# Altium PCB DRV8701EVM.PcbDoc (part 1 of 2)
Units mil, origin at the board's own origin, x right, y up, seen from the top; angles counter-clockwise.
Board outline 3500 x 2200 mil, 2 copper layers (Top Layer, Bottom Layer), stack 64.8 mil thick; 118 components, 65 nets, 313 pads, 397 vias.
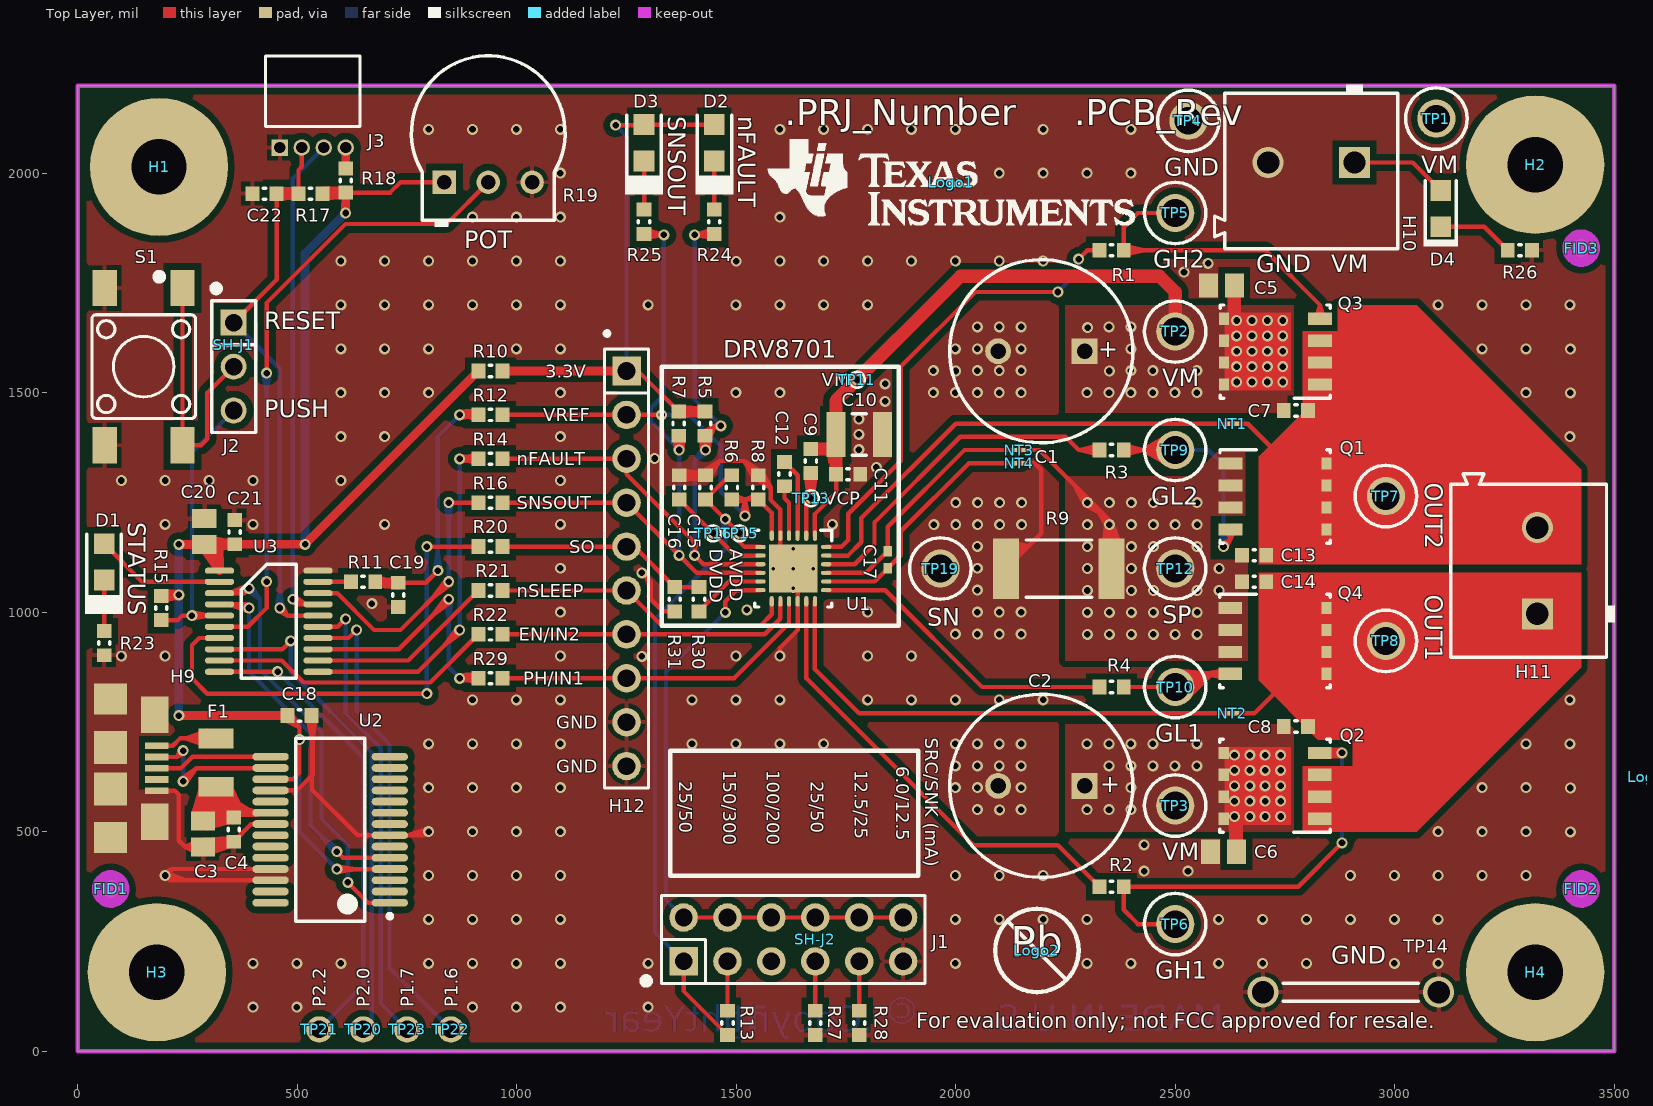
[diagram p0: Top Layer view]
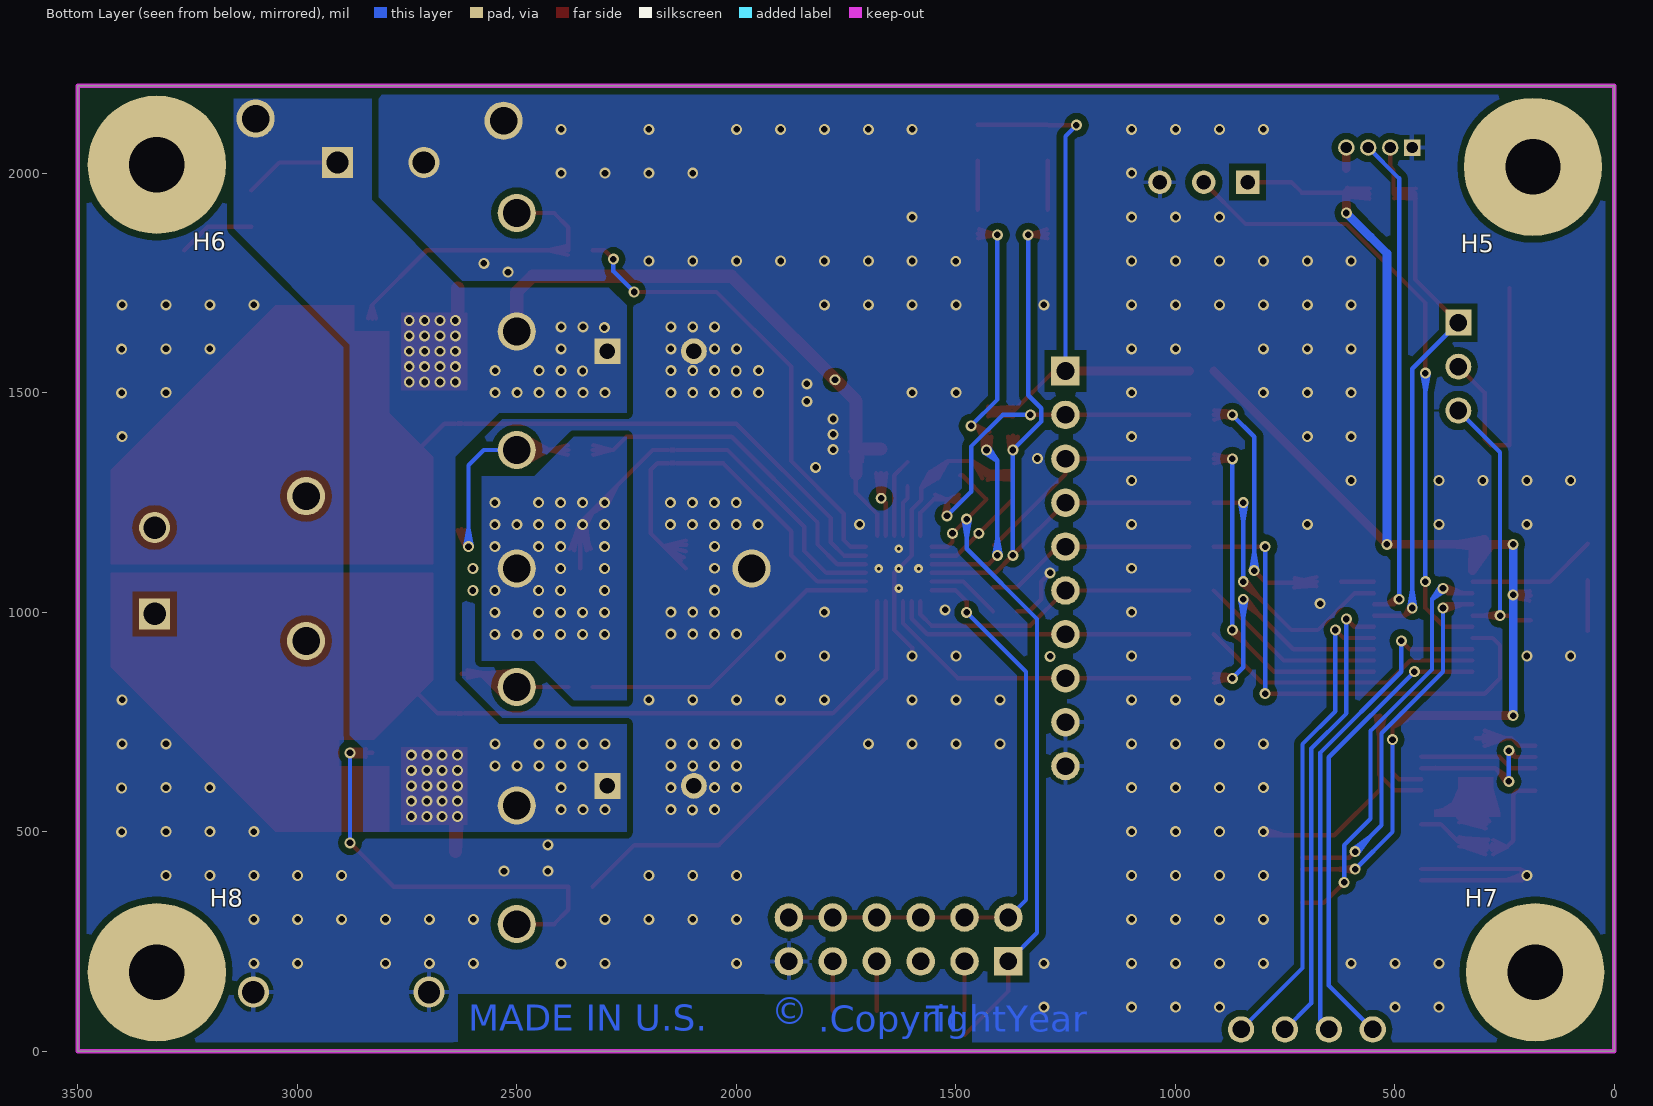
[diagram p1: Bottom Layer view, seen from below]

## Layer stack, top to bottom
Top Solder: solder mask 0.4, Solder Resist, Dk 3.5
Top Layer: signal copper 2.8
Dielectric1: core 59.2, FR-4, Dk 4.8
Bottom Layer: signal copper 2.8
Bottom Solder: solder mask 0.4, Solder Resist, Dk 3.5

## Board outline
0,0 3500,0 3500,2200 0,2200

## Design rules (kind name [scope] priority, off if disabled: settings)
AcuteAngle [All] p1: minimum=4.50000000000000E+0001 checktracksonly=FALSE
AssemblyTestPointUsage [All] p1: valid=2
Clearance Clearance_BoardEdge_MountingHoles [OnCopper and InComponentClass('Mounting Holes') vs IsKeepOut] p1: gap=15 ignorepadtopadclearanceinfootprint=FALSE except(0: Arc-Hole Track-Hole SMDPad-Hole THPad-Hole Via-Hole Fill-Hole Poly-Hole Region-Hole Text-Hole)
Clearance Clearance_BoardEdge_Poly [OnCopper and InPoly vs IsKeepOut] p2: gap=15 ignorepadtopadclearanceinfootprint=FALSE except(0: Arc-Hole Track-Hole SMDPad-Hole THPad-Hole Via-Hole Fill-Hole Poly-Hole Region-Hole Text-Hole)
Clearance Clearance_BoardEdge [OnCopper and Not InComponentClass('Logo') and not InComponentClass('FiducialMark') and not InRegion(1000,500,4000,800) and Not IsKeepout vs IsKeepOut] p3: gap=15 ignorepadtopadclearanceinfootprint=FALSE except(0: Arc-Hole Track-Hole SMDPad-Hole THPad-Hole Via-Hole Fill-Hole Poly-Hole Region-Hole Text-Hole)
Clearance Clearance_Poly [InPolygon] p4: gap=15 ignorepadtopadclearanceinfootprint=FALSE except(0: Arc-Hole Track-Hole SMDPad-Hole THPad-Hole Via-Hole Fill-Hole Poly-Hole Region-Hole Text-Hole)
Clearance [All] p5: gap=7 ignorepadtopadclearanceinfootprint=FALSE except(0: Arc-Hole Track-Hole SMDPad-Hole THPad-Hole Via-Hole Fill-Hole Poly-Hole Region-Hole Text-Hole)
ComponentClearance ComponentClearance_Shunt [InComponentClass('Header') vs InComponentClass('Shunt')] p1: gap=0 collisioncheckmode=3 verticalgap=0 showdistances=FALSE
ComponentClearance ComponentClearance_Logo [InComponentClass('Logo')] p2: gap=15 collisioncheckmode=3 verticalgap=10 showdistances=FALSE
ComponentClearance ComponentClearance_ScrewToNut [(HasFootprint('NY PMS 440 0025 PH')) vs (HasFootprint('Keystone_1902C'))] p3: gap=5 collisioncheckmode=3 verticalgap=10 showdistances=FALSE
ComponentClearance ComponentClearance_MountingHoles [InComponentClass('Mounting Holes')] p4: gap=15 collisioncheckmode=3 verticalgap=100000 showdistances=FALSE
ComponentClearance ComponentClearance_SmallPassives [HasFootprint('0201*') or HasFootprint('0402*') or HasFootprint('0508') or HasFootprint('0603*') or HasFootprint('0612') or HasFootprint('0805*') or HasFootprint('0815*') or HasFootprint('0830*') or HasFootprint('1206*') or HasFootprint('1210*') or HasFootprint('1808*') or HasFootprint('1812*') or HasFootprint('1825*') or HasFootprint('2010*') or HasFootprint('2220*') or HasFootprint('2225*') or HasFootprint('2512*') or HasFootprint('2728*') or HasFootprint('3518*') vs HasFootprint('0201*') or HasFootprint('0402*') or HasFootprint('0508') or HasFootprint('0603*') or HasFootprint('0612') or HasFootprint('0805*') or HasFootprint('0815*') or HasFootprint('0830*') or HasFootprint('1206*') or HasFootprint('1210*') or HasFootprint('1808*') or HasFootprint('1812*') or HasFootprint('1825*') or HasFootprint('2010*') or HasFootprint('2220*') or HasFootprint('2225*') or HasFootprint('2512*') or HasFootprint('2728*') or HasFootprint('3518*')] p5: gap=15 collisioncheckmode=3 verticalgap=10 showdistances=FALSE
ComponentClearance ComponentClearance_THtoSMT [IsThruComponent vs IsSMTComponent] p6: gap=15 collisioncheckmode=3 verticalgap=25 showdistances=FALSE
ComponentClearance ComponentClearance_THtoTH [IsThruComponent vs IsThruComponent] p7: gap=15 collisioncheckmode=3 verticalgap=15 showdistances=FALSE
ComponentClearance [All] p8: gap=15 collisioncheckmode=3 verticalgap=10 showdistances=FALSE
DiffPairsRouting [All] p1: maxlimit=100 minlimit=10 mostfreqgap=10 toplayer_minwidth=15 toplayer_maxwidth=15 toplayer_prefwidth=15 bottomlayer_minwidth=15 bottomlayer_maxwidth=15 bottomlayer_prefwidth=15 maxuncoupledlength=1000
FabricationTestPointUsage TestPointUsage [All] p1: valid=2 allowmultiple=FALSE
FabricationTestpoint Testpoint [All] p1: side=3 testpointundercomponent=TRUE minsize=40 maxsize=100 preferedsize=60 minholesize=0 maxholesize=40 preferedholesize=32 testpointgrid=1 allowsidetop=TRUE allowsidebottom=TRUE usegrid=TRUE gridtolerance=0.01
FanoutControl Fanout_LCC [IsLCC] p1: bgadir=Out bgaviamode=Centered fanoutstyle=Auto fanoutdirection=Alternating viagrid=1 // Fanout_LCC (Default Rule)
FanoutControl Fanout_BGA [IsBGA] p2: bgadir=Out bgaviamode=Centered fanoutstyle=Auto fanoutdirection=Alternating viagrid=1 // Fanout_BGA (Default Rule)
FanoutControl Fanout_Default [All] p4: bgadir=Out bgaviamode=Centered fanoutstyle=Auto fanoutdirection=Alternating viagrid=1 // Fanout_Default (Default Rule)
FanoutControl Fanout_Small [(CompPinCount < 5)] p5: bgadir=Out bgaviamode=Centered fanoutstyle=Auto fanoutdirection=OutThenIn viagrid=1 // Fanout_Small (Default Rule)
HoleSize [All] p1: absolutevalues=TRUE maxlimit=251 minlimit=8 maxpercent=80.000 minpercent=20.000
MinimumAnnularRing MinimumAnnularRing_ThermalPadVias [IsVia and InAnyComponent] p1: minimumring=3.9
MinimumAnnularRing [All] p2: minimumring=3.9
MinimumSolderMaskSliver MinimumSolderMaskSliver_Logo [InComponentClass('Logo') vs InComponentClass('Logo')] p1: minsoldermaskwidth=0.7
MinimumSolderMaskSliver [All] p2: minsoldermaskwidth=2
PlaneConnect [All] p1: planeconnectstyle=Relief reliefexpansion=10 reliefentries=4 reliefconductorwidth=10 reliefairgap=10
PolygonConnect PolygonConnect_1 [IsNamedPolygon('TOP_GND_PLN') or IsNamedPolygon('BOT_GND_PLN') vs Not (InComponent('U1') or InComponent('U2') or InComponent('U3') or InComponent('Q3') or InComponent('Q4') or InComponent('Q5') or InComponent('Q6') or InComponent('C1') or InComponent('C2') or InComponent('C5') or InComponent('C6') or InComponent('C10') or InComponent('C11') or InComponent('C15') or InComponent('C16') or InComponent('R8') or InComponent('R9') or InComponent('H9') or InComponent('H10') or InComponent('TP4') or IsStitchingVia or IsVia)] p1: connectstyle=Relief reliefconductorwidth=10 reliefentries=4 polygonreliefangle="90 Angle" airgapwidth=10
PolygonConnect [All] p2: connectstyle=Direct reliefconductorwidth=10 reliefentries=4 polygonreliefangle="90 Angle" airgapwidth=10
RoutingVias ThermalPadVias [IsVia and InAnyComponent] p1: holewidth=7.87 width=19.68 viastyle="Through Hole" minholewidth=7.87 minwidth=19.68 maxholewidth=12.99 maxwidth=23.62
RoutingVias [All] p2: holewidth=16 width=34 viastyle="Through Hole" minholewidth=7.87 minwidth=25 maxholewidth=40 maxwidth=65
SMDToCorner [All] p1: distance=30000
SilkToSilkClearance [All] p1: silktosilkclearance=5
SilkToSolderMaskClearance SilkscreenOverComponentPads [IsPad] p1: minsilkscreentomaskgap=1.95 clearancetoexposedcopper=TRUE
SolderMaskExpansion [All] p1: expansion=1.97 istentingtop=FALSE
Width [All] p1: maxlimit=100 minlimit=6 preferedwidth=10 checkconnectedcopper=TRUE
16 further rules are at their usual default settings.

## Classes and differential pairs
component class Header: H12 J1 J2
component class AssemblyNote: ZZ1 ZZ2 ZZ3 ZZ4
component class DRV8701EVM_HARDWARE: FID1 FID2 FID3 H1 H2 H3 H4 H5 H6 H7 H8 Logo1 Logo2 Logo3 ZZ1 ZZ2 ZZ3 ZZ4
component class Logo: Logo1
component class DRV8701EVM_SCHEMATIC: C1 C2 C3 C4 C5 C6 C7 C8 C9 C10 C11 C12 C13 C14 C15 C16 C17 C18 C19 C20 C21 C22 D1 D2 D3 D4 F1 H9 H10 H11 H12 J1 J2 J3 NT1 NT2 NT3 NT4 Q1 Q2 Q3 Q4 R1 R2 R3 R4 R5 R6 R7 R8 R9 R10 R11 R12 R13 R14 R15 R16 R17 R18 R19 R20 R21 R22 R23 R24 R25 R26 R27 R28 R29 R30 R31 S1 SH-J1 SH-J2 TP1 TP2 TP3 TP4 TP5 TP6 TP7 TP8 TP9 TP10 TP11 TP12 TP13 TP14 TP15 TP16 TP19 TP20 TP21 TP22 TP23 U1 U2 U3
component class Shunt: SH-J1 SH-J2
component class FiducialMark: FID1 FID2 FID3
component class "Mounting Holes": H1 H2 H3 H4

## Components (designator, comment, footprint, x,y, rotation, side; value= is the part's Value field where it differs from the comment)
C1 "ECA-1HM471" M_1000x2000 2195,1595 r180 top
C2 "ECA-1HM471" M_1000x2000 2195,605 r180 top
C3 "C2012X7R1A475M" 0805L 285,495 r270 top
C4 "C0603C104K8RACTU" 0603L 355,505 r270 top
C5 "GRM21BR71H105KA12L" 0805L 2605,1745 r180 top
C6 "GRM21BR71H105KA12L" 0805L 2610,455 r180 top
C7 "DNP" 0603L 2775,1460 r0 top
C8 "DNP" 0603L 2775,740 r0 top
C9 "C1608X7R1C105K" 0603L 1670,1345 r90 top
C10 "GRM32ER71H106KA12L" 1210L 1780,1405 r0 top
C11 "C1608X7R1H104K" 0603L 1755,1315 r0 top
C12 "C1608X7R1H104K" 0603L 1610,1315 r270 top
C13 "DNP" 0603L 2680,1130 r180 top
C14 "DNP" 0603L 2680,1070 r180 top
C15 "GRM188R70J105KA01D" 0603L 1430,1285 r90 top
C16 "GRM188R70J105KA01D" 0603L 1370,1285 r270 top
C17 "GRM155R71C102KA01D" 0402L 1845,1120 r270 top
C18 "C0603C104K8RACTU" 0603L 505,765 r0 top
C19 "GRM188R70J105KA01D" 0603L 730,1040 r270 top
C20 "C2012X7R1A475M" 0805L 288.2,1184.8 r90 top
C21 "C0603C104K8RACTU" 0603L 357.2,1182.8 r90 top
C22 "GRM188R71C102KA01D" 0603L 425.21,1954 r180 top
D1 "LTST-C171GKT" LED_LTST-C171 60,1115 r270 top
D2 "LTST-C170KRKT" LED_LTST-C170 1450,2070 r270 top
D3 "LTST-C170KRKT" LED_LTST-C170 1290,2070 r270 top
D4 "LTST-C171GKT" LED_LTST-C171 3105,1920 r270 top
F1 "1206L050/15YR" 1206_FUSE 315,658 r270 top
FID1 "Fiducial" Fiducial10-20 75,370 r0 top
FID2 "Fiducial" Fiducial10-20 3425,370 r0 top
FID3 "Fiducial" Fiducial10-20 3425,1830 r0 top
H1 "NY PMS 440 0025 PH" "NY PMS 440 0025 PH" 185,2015 r0 top locked
H2 "NY PMS 440 0025 PH" "NY PMS 440 0025 PH" 3320,2020 r0 top locked
H3 "NY PMS 440 0025 PH" "NY PMS 440 0025 PH" 180,180 r0 top locked
H4 "NY PMS 440 0025 PH" "NY PMS 440 0025 PH" 3320,180 r0 top locked
H5 "1902C" Keystone_1902C 185.13,2015.01 r180 bottom
H6 "1902C" Keystone_1902C 3320.36,2020 r180 bottom
H7 "1902C" Keystone_1902C 180.36,180 r180 bottom
H8 "1902C" Keystone_1902C 3320.36,180 r180 bottom
H9 "ZX62-B-5PA(11)" CONN_USB_micro_ZX62-B-5PA 180,645 r270 top
H10 "691 101 710 002" Wurth_691101710002 2810,2025 r180 top
H11 "691 101 710 002" Wurth_691101710002 3325,1095 r90 top
H12 "TSW-110-07-G-S" TSW-110-07-G-S 1250,1100 r270 top
J1 "PEC06DAAN" CONN_PEC06DAAN 1630,255 r0 top
J2 "PEC03SAAN" CONN_PEC03SAAN 355,1560 r270 top
J3 "851-43-004-20-001000" CONN_851-43-004-20-001000 535.21,2059 r180 top
Logo1 "Texas Instruments" TI_Stacked_Overlay_Small 1990,1980 r0 top
Logo2 "Pb-Free Symbol" Pb-Free_Overlay_Medium 2185,230 r0 top
Logo3 "FCC disclaimer" FCC_disclaimer 3583,626 r90 top
NT1 "Net-Tie" Net-Tie_10mil 2630,1430 r0 top
NT2 "Net-Tie" Net-Tie_10mil 2630,770 r0 top
NT3 "Net-Tie" Net-Tie_10mil 2145,1370 r180 top
NT4 "Net-Tie" Net-Tie_10mil 2145,1340 r0 top
Q1 "CSD18532Q5B" TRANS_NexFET_Q5B 2720.3,1594.09 r180 top
Q2 "CSD18532Q5B" TRANS_NexFET_Q5B 2720,605 r180 top
Q3 "CSD18532Q5B" TRANS_NexFET_Q5B 2735.3,1264.09 r0 top
Q4 "CSD18532Q5B" TRANS_NexFET_Q5B 2735,935 r0 top
R1 "CRCW06030000Z0EA" 0603L 2355,1825 r180 top
R2 "CRCW06030000Z0EA" 0603L 2355,375 r0 top
R3 "CRCW06030000Z0EA" 0603L 2355,1370 r180 top
R4 "CRCW06030000Z0EA" 0603L 2355,830 r0 top
R5 "CRCW060310K0JNEA" 0603L 1428.7,1430 r270 top
R6 "DNP" 0603L 1490,1285 r90 top
R7 "CRCW060310K0JNEA" 0603L 1368.7,1430 r270 top
R8 "DNP" 0603L 1550,1285 r270 top
R9 "CRA2512-FZ-R010ELF" 2512M 2235,1100 r0 top
R10 "CRCW06030000Z0EA" 0603L 940,1550 r180 top
R11 "CRCW060310K0JNEA" 0603L 650,1070 r0 top
R12 "CRCW06030000Z0EA" 0603L 940,1450 r180 top
R13 "CRCW060368K0JNEA" 0603L 1480,65 r270 top
R14 "CRCW06030000Z0EA" 0603L 940,1350 r180 top
R15 "CRCW060347K0JNEA" 0603L 190,1010 r90 top
R16 "CRCW06030000Z0EA" 0603L 940,1250 r180 top
R17 "CRCW060347K0JNEA" 0603L 530.21,1954 r0 top
R18 "CRCW06030000Z0EA" 0603L 610.21,1984 r270 top
R19 "3352T-1-503LF" Bourns_3352T 935,1980 r0 top
R20 "CRCW06030000Z0EA" 0603L 940,1150 r180 top
R21 "CRCW06030000Z0EA" 0603L 940,1050 r180 top
R22 "CRCW06030000Z0EA" 0603L 940,950 r180 top
R23 "CRCW0603330RJNEA" 0603L 60,930 r90 top
R24 "CRCW0603330RJNEA" 0603L 1450,1890 r90 top
R25 "CRCW0603330RJNEA" 0603L 1290,1890 r90 top
R26 "CRCW06034K99FKEA" 0603L 3285,1825 r180 top
R27 "CRCW0603200KJNEA" 0603L 1680,65 r90 top
R28 "CRCW060333K0JNEA" 0603L 1780,65 r90 top
R29 "CRCW06030000Z0EA" 0603L 940,850 r180 top
R30 "CRCW06037K50JNEA" 0603L 1415,1030 r270 top
R31 "CRCW060310K0JNEA" 0603L 1360,1030 r270 top
S1 "4-1437565-1" SW_FSM4JSMA 150,1560 r0 top
SH-J1 "969102-0000-DA" SNT-100-BK-G 355,1610 r90 top
SH-J2 "969102-0000-DA" SNT-100-BK-G 1680,255 r90 top
TP1 "5005" Keystone5005 3095,2125 r0 top
TP2 "5005" Keystone5005 2500,1640 r0 top
TP3 "5005" Keystone5005 2500,560 r0 top
TP4 "5006" Keystone5006 2530,2120 r0 top
TP5 "5007" Keystone5007 2500,1910 r0 top
TP6 "5007" Keystone5007 2500,290 r0 top
TP7 "5007" Keystone5007 2980,1265 r0 top
TP8 "5007" Keystone5007 2980,935 r0 top
TP9 "5007" Keystone5007 2500,1370 r0 top
TP10 "5007" Keystone5007 2500,830 r0 top
TP11 "VM" TP_VIA_018RND008 1775,1530 r90 top
TP12 "5006" Keystone5006 2500,1100 r0 top
TP13 "VCP" TP_VIA_018RND008 1670,1260 r180 top
TP14 "D3082-05" Harwin_D3082-05 2900,135 r180 top
TP15 "AVDD" TP_VIA_018RND008 1507.44,1180 r0 top
TP16 "DVDD" TP_VIA_018RND008 1447.44,1180 r90 top
TP19 "5006" Keystone5006 1965,1100 r0 top
TP20 "TESTPOINT" TP_VIA_060RND040 650,50 r90 top
TP21 "TESTPOINT" TP_VIA_060RND040 550,50 r90 top
TP22 "TESTPOINT" TP_VIA_060RND040 850,50 r90 top
TP23 "TESTPOINT" TP_VIA_060RND040 750,50 r90 top
U1 "DRV8701ERGER" RGE0024F 1630,1100 r270 top
U2 "FT232RL" SSOP28_N 575,505 r180 top
U3 "MSP430G2553IPW20" PW0020A_N 435,980 r0 top
ZZ1 "This Assembly Note is for PCB labels only" AssemblyNoteLabel 185,2655 r0 top
ZZ2 "These assemblies are ESD sensitive, ESD precautions shall be observed." AssemblyNote 185,2569.11 r0 top
ZZ3 "These assemblies must be clean and free from flux and all contaminants. Use of no clean flux is not acceptable." AssemblyNote 185,2480.56 r0 top
ZZ4 "These assemblies must comply with workmanship standards IPC-A-610 Class 2, unless otherwise specified." AssemblyNote 185,2395 r0 top

## Footprints (in the part's own frame and the unit in brackets; to place one, negate y for a bottom-side part, rotate by r counter-clockwise, add the part's x,y. Pads: shape width x height; smd on the part's side, far side on the other; paste and mask are expansions set on the pad)
0402L [mm] "0402 from SM-752 data"
  rect 0.6x0.5 smd: 1(-0.5,0) 2(0.5,0)
  body extent -0.55,-0.3 0.55,0.3, height 0.6
0603L [mm] "0603 from SM-752 data"
  rect 0.8x0.85 smd: 1(-0.7,0) 2(0.7,0)
  silkscreen extent -0.07,-0.33 0.07,0.33, body extent -0.87,-0.47 0.87,0.47, height 0.85
0805L [mm] "0805 from SM-752 data"
  rect 1.1x1.4 smd: 1(-0.75,0) 2(0.75,0)
  body extent -1.1,-0.72 1.1,0.72, height 1.1
1206_FUSE [mil]
  rect 45x80 smd mask+2: 1(-55,0) 2(55,0)
1210L [mm] "1210 from SM-752 data"
  rect 1.1x2.6 smd: 1(-1.35,0) 2(1.35,0)
  silkscreen extent -0.4,-1.2 0.4,1.2, body extent -1.7,-1.35 1.7,1.35, height 1.35
2512M [mm] "Chip Resistor, Body 6.3x3.2mm, IPC Low Density"
  rect 1.5x3.5 smd: 1(-3.05,0) 2(3.05,0)
  silkscreen extent -1.9,-1.65 1.9,1.65, body extent -3.22,-1.67 3.22,1.67, height 0.71
AssemblyNote [mil] "Assembly Note"
AssemblyNoteLabel [mil] "Assembly Note for PCB Labels"
Bourns_3352T [mm] "TH, 3-Leads, Body 9.53x8.89mm, Pitch 2.54mm"
  rect 1.35x1.35 hole 0.85: 1(-2.54,0)
  round 1.35 hole 0.85: 2(0,0) 3(2.54,0)
  silkscreen extent -4.44,-2.6 4.44,7.31, body extent -4.44,-2.21 4.45,7.32, height 3.81
CONN_851-43-004-20-001000 [mm] "MILL-MAX"
  rect 0.95x0.95 hole 0.65: 1(1.905,0)
  round 0.95 hole 0.65: 2(0.635,0) 3(-0.635,0) 4(-1.905,0)
  silkscreen extent -2.73,-5.31 2.73,-1.22, body extent -2.73,-5.31 2.73,0.23, height 2.23
CONN_PEC03SAAN [mm] "SULLINS"
  rect 1.5x1.5 hole 1.016: 1(-2.54,0)
  round 1.5 hole 1.016: 2(0,0) 3(2.54,0)
  silkscreen extent -4.72,-1.27 3.81,1.27, body extent -3.84,-1.3 3.84,1.3, height 8.38
CONN_PEC06DAAN [mm] "SULLINS"
  rect 1.65x1.65 hole 1.016 mask+0: 1(-6.35,-1.27)
  round 1.65 hole 1.016 mask+0: 2(-6.35,1.27) 3(-3.81,-1.27) 4(-3.81,1.27) 5(-1.27,-1.27) 6(-1.27,1.27) 7(1.27,-1.27) 8(1.27,1.27) 9(3.81,-1.27) 10(3.81,1.27) 11(6.35,-1.27) 12(6.35,1.27)
  silkscreen extent -8.72,-2.6 7.62,2.54, body extent -7.62,-2.54 7.62,2.54, height 8.38
CONN_USB_micro_ZX62-B-5PA [mm] "Hirose"
  rect 0.4x1.35 smd: 1(-1.3,0) 2(-0.65,0) 3(0,0) 4(0.65,0) 5(1.3,0)
  rect 1.9x1.9 smd: 6(-1.2,-2.675) 7(1.2,-2.675)
  rect 1.8x1.9 smd: 8(-4,-2.675) 9(4,-2.675)
  rect 2.1x1.6 smd: 10(-3.1,-0.125) 11(3.1,-0.125)
  body extent -3.75,-5.32 3.75,0.18, height 2.55
FCC_disclaimer [mil]
Fiducial10-20 [mm]
  round 1 smd paste-0.5 mask+0.5: 1(0,0)
  Top Layer keep-out circle w1.178: c0,0 r0.5
Harwin_D3082-05 [mm] "Shorting Plug, 10.16mm spacing, TH"
  round 1.8 hole 1.3: 1(-5.08,0) 2(5.08,0)
  silkscreen extent -3.9,-0.53 3.9,0.53, body extent -5.6,-0.52 5.61,0.52, height 6.63
Keystone5005 [mil] "Keystone Compact loops"
  round 87 hole 63: 1(0,0)
  silkscreen extent -70,-70 70,70, body extent -63,-63 62,63, height 225
Keystone5006 [mil] "Keystone Compact loops"
  round 87 hole 63: 1(0,0)
  silkscreen extent -70,-70 70,70, body extent -63,-63 62,63, height 225
Keystone5007 [mil] "Keystone Compact loops"
  round 87 hole 63: 1(0,0)
  silkscreen extent -70,-70 70,70, body extent -63,-63 62,63, height 225
Keystone_1902C [mil] "Hex Standoff, 4-40 threaded, nylon"
  round 1 on Mech4: 0(0,0)
  body extent -145,-126 146,126, height 501
LED_LTST-C170 [mm] "LITE-ON"
  rect 1.2x1.2 smd: 1(-1.05,0) 2(1.05,0)
  silkscreen extent -1.6,-1.1 3,1.1, body extent -1.05,-0.67 1.05,0.67, height 1.1
LED_LTST-C171 [mm] "LITE-ON"
  rect 1.2x1.2 smd: 1(-1.05,0) 2(1.05,0)
  silkscreen extent -1.6,-1.1 3,1.1, body extent -1.05,-0.67 1.05,0.67, height 0.8
M_1000x2000 [mm] "Panasonic"
  rect 1.5x1.5 hole 0.9: 1(-2.5,0)
  round 1.5 hole 0.9: 2(2.5,0)
  silkscreen extent -5.3,-5.3 5.3,5.3, body extent -5.21,-5.24 5.24,5.24, height 22.01
Net-Tie_10mil [mil] "10mil net tie, no solder mask opening, no solder paste"
  rect 10x10 smd paste-5 mask-5: 1(-10,0) 2(10,0)
  Top Layer region: -6,5 6,5 6,-5 -6,-5
"NY PMS 440 0025 PH" [mm] "4-40 nylon screw and mounting hole"
  round 8 hole 3.2: 1(0,0)
  body extent -3.3,-3.3 3.3,3.3, height 2.69
Pb-Free_Overlay_Medium [mil]
  silkscreen extent -95,-95 95,95
PW0020A_N [mm] "TSOP, 20-Leads, Body 6.5x4.4mm, Pitch 0.65mm, IPC Medium Density"
  oval 1.7x0.35 smd: 1(-2.85,2.925) 2(-2.85,2.275) 3(-2.85,1.625) 4(-2.85,0.975) 5(-2.85,0.325) 6(-2.85,-0.325) 7(-2.85,-0.975) 8(-2.85,-1.625) 9(-2.85,-2.275) 10(-2.85,-2.925) 11(2.85,-2.925) 12(2.85,-2.275) 13(2.85,-1.625) 14(2.85,-0.975) 15(2.85,-0.325) 16(2.85,0.325) 17(2.85,0.975) 18(2.85,1.625) 19(2.85,2.275) 20(2.85,2.925)
  silkscreen extent -1.6,-3.3 1.6,3.3, body extent -3.21,-3.25 3.21,3.25, height 0.99
RGE0024F [mm] "QFN, 24-Leads, Body 4x4mm, Pitch 0.5mm, Thermal Pad 2.8x2.8mm, TI Recommended"
  oval 0.6x0.24 smd: 1(-1.9,1.25) 2(-1.9,0.75) 3(-1.9,0.25) 4(-1.9,-0.25) 5(-1.9,-0.75) 6(-1.9,-1.25) 13(1.9,-1.25) 14(1.9,-0.75) 15(1.9,-0.25) 16(1.9,0.25) 17(1.9,0.75) 18(1.9,1.25)
  oval 0.24x0.6 smd: 7(-1.25,-1.9) 8(-0.75,-1.9) 9(-0.25,-1.9) 10(0.25,-1.9) 11(0.75,-1.9) 12(1.25,-1.9) 19(1.25,1.9) 20(0.75,1.9) 21(0.25,1.9) 22(-0.25,1.9) 23(-0.75,1.9) 24(-1.25,1.9)
  rect 2.8x2.8 smd paste-1.4: 25(0,0)
  silkscreen extent -2.22,-2.22 2.22,2.22, body extent -2.07,-2.07 2.08,2.08, height 1.01
SNT-100-BK-G [mil] "Samtec STEP model"
  round 1 on Mech3: 0(0,0)
  body extent -100,-50 100,50, height 344
SSOP28_N [mm] "SOP, 28-Leads, Body 10.2x5.3mm, Pitch 0.65mm, IPC Medium Density"
  oval 2.1x0.45 smd mask+0.07: 1(-3.45,4.225) 2(-3.45,3.575) 3(-3.45,2.925) 4(-3.45,2.275) 5(-3.45,1.625) 6(-3.45,0.975) 7(-3.45,0.325) 8(-3.45,-0.325) 9(-3.45,-0.975) 10(-3.45,-1.625) 11(-3.45,-2.275) 12(-3.45,-2.925) 13(-3.45,-3.575) 14(-3.45,-4.225) 15(3.45,-4.225) 16(3.45,-3.575) 17(3.45,-2.925) 18(3.45,-2.275) 19(3.45,-1.625) 20(3.45,-0.975) 21(3.45,-0.325) 22(3.45,0.325) 23(3.45,0.975) 24(3.45,1.625) 25(3.45,2.275) 26(3.45,2.925) 27(3.45,3.575) 28(3.45,4.225)
  silkscreen extent -3.57,-5.3 2,5.3, body extent -2.7,-5.3 2.7,5.3, height 2
SW_FSM4JSMA [mm] "Alcoswitch"
  rect 1.4x2.1 smd: 1(2.25,4.55) 2(2.25,-4.55) 3(-2.25,4.55) 4(-2.25,-4.55)
  silkscreen extent -3,-3 3,5.4, body extent -3,-5 3,5, height 5.1
TI_Stacked_Overlay_Small [mil]
  silkscreen extent -418,-98 418,98
TP_VIA_018RND008 [mil] "TP_VIA_018RND008"
  round 25 hole 15: 1(0,0)
  silkscreen extent -18,-18 18,18
TP_VIA_060RND040 [mil] "TP_VIA_060RND040"
  round 60 hole 40: 1(0,0)
TRANS_NexFET_Q5B [mm] "TI recommended land pattern (nominal) November 2012"
  rect 1.372x0.71 smd paste-0.4: 1(-2.776,1.905) 2(-2.776,0.635) 3(-2.776,-0.635) 4(-2.776,-1.905)
  rect 0.59x0.71 smd paste-0.3: 5(2.776,-1.905) 6(2.776,-0.635) 7(2.776,0.635) 8(2.776,1.905)
  Top Layer region: -1.106,-2.26 2.744,-2.26 2.744,2.26 -1.106,2.26
  silkscreen extent -3.38,-2.7 3,2.7, body extent -3.23,-2.55 2.87,2.55, height 1.06
TSW-110-07-G-S [mm] "Samtec 100mil, 1x10, 230 mil above insulator"
  rect 1.65x1.65 hole 1.016 mask+0: 1(-11.43,0)
  round 1.65 hole 1.016 mask+0: 2(-8.89,0) 3(-6.35,0) 4(-3.81,0) 5(-1.27,0) 6(1.27,0) 7(3.81,0) 8(6.35,0) 9(8.89,0) 10(11.43,0)
  silkscreen extent -13.72,-1.27 12.7,1.27, body extent -12.7,-1.27 12.7,1.27, height 8.38
Wurth_691101710002 [mm] "Terminal Block, 5 mm, 2x1, TH"
  rect 1.8x1.8 hole 1.3: 1(-2.5,0)
  round 1.8 hole 1.3: 2(2.5,0)
  silkscreen extent -5,-4.5 5.6,5, body extent -5.6,-4 5.6,5, height 12.5

## Part data
C1 C2: "CAP, AL, 470 礔, 50 V, +/- 20%,  ohm, TH"
C3 C20: "CAP, CERM, 4.7uF, 10V, +/-20%, X7R, 0805"
C4 C18 C21: "CAP, CERM, 0.1uF, 10V, +/-10%, X7R, 0603"
C5 C6: "CAP, CERM, 1uF, 50V, +/-10%, X7R, 0805"
C7 C8 C13 C14: library part C1608X7R1H103K, "CAP, CERM, 0.01uF, 50V, +/-10%, X7R, 0603"
C9: "CAP, CERM, 1uF, 16V, +/-10%, X7R, 0603"
C10: "CAP, CERM, 10uF, 50V, +/-10%, X7R, 1210"
C11 C12: "CAP, CERM, 0.1uF, 50V, +/-10%, X7R, 0603"
C15 C16 C19: "CAP, CERM, 1uF, 6.3V, +/-10%, X7R, 0603"
C17: "CAP, CERM, 1000pF, 16V, +/-10%, X7R, 0402"
C22: "CAP, CERM, 1000pF, 16V, +/-10%, X7R, 0603"
D1 D4: "LED, Green, SMD"
D2 D3: "LED, Red, SMD"
F1: library part FUSE_1206L_SERIES, "Fuse, Poly Resetable PTC, 0.5A"
FID1 FID2 FID3: "Fiducial mark.  There is nothing to buy or mount."
H1 H2 H3 H4: "Machine Screw, Round, #4-40 x 1/4, Nylon, Philips panhead"
H5 H6 H7 H8: "Standoff, Hex, 0.5\"L #4-40 Nylon"
H9: "Connector, micro USB Type B, Receptacle, R/A, SMD"
H10 H11: "Terminal Block, 5 mm, 2x1, Tin, TH"
H12: "Header, 100mil, 10x1, Gold, TH"
J1: "Header, 100mil, 6x2, Tin, TH"
J2: "Header, 100mil, 3x1, Tin, TH"
J3: "SOCKET .050\" GRID SIP 4 POS R/A, TH"
Logo1: library part TI_Logo, "Texas Instrument Corporate Signature"
Logo2: library part Pb-Free
Logo3: library part FCC_disclaimer, "FCC_disclaimer"
NT1 NT2 NT3 NT4: "Single point connection between nets."
Q1 Q2 Q3 Q4: "MOSFET, N-CH, 60V, 172A, SON 5x6mm"
R1 R2 R3 R4 R10 R12 R14 R16 R18 R20 R21 R22 R29: "RES, 0 ohm, 5%, 0.1W, 0603"
R5 R7 R11: "RES, 10k ohm, 5%, 0.1W, 0603"
R6 R8: library part CRCW06030000Z0EA, "RES, 0 ohm, 5%, 0.1W, 0603"
R9: "RES, 0.01 ohm, 1%, 3W, 2512"
R13: "RES, 68k ohm, 5%, 0.1W, 0603"
R15 R17: "RES, 47k ohm, 5%, 0.1W, 0603"
R19: "Trimming Potentiometer, 50K, 0.5W, TH"
R23 R24 R25: "RES, 330 ohm, 5%, 0.1W, 0603"
R26: "RES, 4.99k ohm, 1%, 0.1W, 0603"
R27: "RES, 200k ohm, 5%, 0.1W, 0603"
R28: "RES, 33k ohm, 5%, 0.1W, 0603"
R30: "RES, 7.5 k, 5%, 0.1 W, 0603"
R31: "RES, 10 k, 5%, 0.1 W, 0603"
S1: "Switch, Tactile, SPST-NO, 0.05A, 12V, SMT"
SH-J1 SH-J2: "Shunt, 100mil, Gold plated, Black"
TP1 TP2 TP3: "Test Point, Compact, Red, TH"
TP4 TP12 TP19: "Test Point, Compact, Black, TH"
TP5 TP6 TP7 TP8 TP9 TP10: "Test Point, Compact, White, TH"
TP11 TP13 TP15 TP16: library part TESTPOINT, "TEST POINT.  No entry in BOM."
TP14: "1mm Uninsulated Shorting Plug, 10.16mm spacing, TH"
TP20 TP21 TP22 TP23: "TEST POINT.  No entry in BOM."
U1: "H-Bridge Gate Driver, RGE0024F"
U2: "USB to Serial UART, SSOP28"
U3: "16 MHz Mixed Signal Microcontroller with 16 KB Flash, 512 B SRAM and 24 GPIOs, -40 to 85 degC, 20-pin SOP (PW), Green (RoHS & no Sb/Br)"
ZZ1: library part AssemblyNoteLabel
ZZ2 ZZ3 ZZ4: library part AssemblyNote

## Via types
v1: diameter 25, hole 15, Top Layer to Bottom Layer, tented both sides, 392 vias
v2: diameter 20, hole 8, Top Layer to Bottom Layer, 5 vias

## Nets (pads, with @x,y where several pads share a name; then routed paths per layer and width w, separated by ;. In a path a pad name is that pad's centre, name@x,y a point inside that pad or via, vN(x,y) a via of type N, cw(c..) or ccw(c..) an arc to the next point about the centre after c; other vN are vias at no path point)
3.3V: D2.1 D3.1 H12.1 R5.1 R7.1 R10.1 | length 1987.1
  Top Layer w10: v1(1225,2110) 1288.66,2110 D3.1@1290,2111.34 D2.1@1450,2111.34 ; H12.1@1250,1550 1276.26,1550 R7.1@1368.7,1457.56 R5.1@1428.7,1457.56 ; R7.1@1369.05,1446.83 R5.1@1415.66,1449.48 ; R7.1@1369.05,1468.29 R5.1@1415.66,1465.64 ; R7.1@1372.75,1447.26 R5.1@1415.66,1465.64 ; R7.1@1372.75,1467.86 R5.1@1415.66,1449.48 ; R5.1@1426.45,1446.89 R7.1@1381.97,1457.56 ; R5.1@1426.45,1468.23 R7.1@1381.97,1457.56 ; R5.1@1427.72,1457.56 R7.1@1381.97,1457.56 ; R7.1@1369.69,1457.56 R5.1@1415.43,1457.56 ; R7.1@1369.69,1457.56 R5.1@1415.66,1449.48 ; R7.1@1369.69,1457.56 R5.1@1415.66,1465.64 ; R7.1@1369.69,1457.56 R5.1@1415.43,1457.56 ; R5.1@1415.43,1457.56 1370.95,1468.23 R5.1@1415.43,1457.56 ; R5.1@1415.43,1457.56 1370.95,1446.89 R5.1@1415.43,1457.56
  Top Layer w20: R10.1@967.56,1550 H12.1@1250,1550
  Bottom Layer w10: v1(1225,2110) 1250,2085 H12.1@1250,1550
3.3V_MCU: C18.1 C20.1 C21.1 R10.2 R15.2 R17.2 R18.2 R19.1 U2.4 U2.17 U3.1 | length 7062.6
  Top Layer w10: R15.2@190,1037.56 R15.2@192.44,1040 ; v1@226.84,1046.8 R15.2@193.12,1027.03 ; v1@227.72,1032.86 R15.2@191.79,1048.28 ; v1@228.82,1047.41 R15.2@190.98,1037.56 ; v1@229.25,1032.54 R15.2@192.44,1040 ; v1@229.25,1047.46 R15.2@192.44,1040 ; v1@229.75,1032.5 R15.2@190.98,1037.56 ; v1@230.88,1047.45 R15.2@191.79,1048.28 ; v1@231.8,1032.72 R15.2@193.12,1027.03 ; C20.1@287.93,1155 C20.1@288.2,1155.27 ; U2.17@439.17,620.16 490.16,620.16 ; C18.1@471.14,755.31 505,737.44 ; U2.17@471.65,620.16 490.16,620.16 ; C18.1@477.44,764.02 505,737.44 ; C18.1@477.44,765 505,737.44 ; C18.1@485.91,770.63 505,737.44 ; R17.2@556.48,1965.66 R18.2@602.54,1965.82 ; R17.2@557.57,1942.27 R18.2@603.56,1946.83 ; R17.2@557.77,1953.02 R18.2@603.56,1946.83 ; R17.2@557.77,1954 560.21,1956.45 R18.2@610.21,1956.45 711.45,1956.45 735,1980 R19.1@835,1980 ; R17.2@560.44,1963.43 R18.2@603.56,1946.83 ; R17.2@561.5,1944.91 R18.2@602.54,1965.82 ; v1(590,415) 710.39,415 U2.4@710.83,415.43 ; v1@590.66,407.53 632.5,415 v1@590.66,422.47 ; R18.2@607.96,1945.77 R17.2@563.48,1956.45 ; R18.2@607.96,1967.12 R17.2@563.48,1956.45 ; R18.2@609.22,1956.45 R17.2@563.48,1956.45 ; v1(610,1910) v1@610.21,1910.21 ; 639.49,415 U2.4@678.35,415.43 ; R15.2@190.98,1037.56 v1(230,1040) ; R15.2@190.98,1037.56 v1(230,1040) ; R15.2@191.79,1048.28 v1(230,1040) ; R15.2@191.79,1048.28 v1(230,1040) ; R15.2@192.44,1040 v1(230,1040) ; R15.2@192.44,1040 v1(230,1040) ; R15.2@193.12,1027.03 v1(230,1040) ; R15.2@193.12,1027.03 v1(230,1040) ; 490.16,620.16 505,635 v1(505,710) 505,737.44 ; R17.2@557.77,1954.99 R18.2@603.62,1956.45 ; R17.2@557.77,1954.99 R18.2@602.54,1965.82 ; R17.2@557.77,1954.99 R18.2@603.66,1956.45 ; R18.2@603.62,1956.45 558.69,1965.7 R18.2@603.66,1956.45 ; R18.2@603.62,1956.45 559.36,1944.36 R18.2@603.66,1956.45
  Top Layer w20: v1(230,765) C18.1@477.44,765 401.69,765 ; v1(230,1155) C21.1@357.17,1155 ; C20.1@280.47,1155 C21.1@356.22,1155.24 ; C20.1@284.07,1149.35 U3.1@322.8,1095.16 ; C20.1@284.29,1148.99 U3.1@322.17,1100.6 ; C20.1@295.14,1143.66 C21.1@357.17,1155 ; C20.1@295.19,1166.88 C21.1@357.17,1155.27 ; C20.1@295.24,1166.87 C21.1@357.17,1155 ; C20.1@304.94,1159.59 U3.1@322.17,1100.6 ; C20.1@305.03,1159.35 U3.1@322.8,1095.16 ; C21.1@357.2,1155.24 v1(517.68,1155.24) ; C21.1@358.19,1155.24 433.94,1155.24 ; 445.18,1155.24 v1(517.68,1155.24) ; R10.2@912.44,1550 v1(517.68,1155.24) ; C20.1@294.11,1155.27 322.17,1155.27 ; C20.1@294.11,1155.27 U3.1@322.17,1100.6 ; C20.1@294.11,1155.27 U3.1@322.8,1095.16 ; C20.1@294.11,1155.27 322.17,1155.27 ; C20.1@294.11,1155.27 C21.1@357.17,1155 ; C20.1@294.11,1155.27 C21.1@357.17,1155.27 ; C20.1@294.11,1155.27 C21.1@356.22,1155.24 ; C20.1@294.11,1155.27 C21.1@356.22,1155.24 ; C20.1@295.19,1143.67 C21.1@357.17,1155.27 ; C20.1@295.2,1143.67 C21.1@356.22,1155.24 ; C20.1@295.2,1143.67 C21.1@356.22,1155.24 ; U3.1@322.17,1100.6 322.17,1155.27 ; 322.17,1155.27 U3.1@322.8,1095.16 ; 322.17,1155.27 296.53,1166.67 322.17,1155.27 ; 322.17,1155.27 296.53,1143.87 322.17,1155.27 ; C21.1@356.22,1155.24 C20.1@288.2,1155.27 C21.1@357.17,1155.27 ; C21.1@356.22,1155.24 295.21,1166.87 C21.1@356.22,1155.24 ; R18.2@610.21,1956.45 610.21,1910.21 R18.2@610.21,1956.45 ; R18.2@610.21,1956.45 v1(610,1910) R18.2@610.21,1956.45
  Bottom Layer w10: v1@225,1155 v1@225.21,1155.21 ; v1(505,710) 505,500 v1(590,415)
  Bottom Layer w20: v1(230,765) v1(230,1155) 230,1082.5 ; 230,967.5 v1(230,1040) ; v1(517.68,1155.24) 517.68,1817.68 v1(610,1910) 555.07,1855.07
5V_USB: C3.1 C4.1 F1.2 U2.20 | length 1294.7
  Top Layer w10: C3.1@285,524.53 293.03,532.56 C4.1@355,532.56 ; C3.1@288.43,541 C4.1@341.63,540.56 ; C3.1@289.3,530.98 C4.1@341.63,540.56 ; C3.1@290.31,531.15 C4.1@343.16,532.56 ; C3.1@290.33,531.16 C4.1@344.72,532.56 ; C3.1@291.14,517.88 C4.1@347.23,523.21 ; C3.1@291.45,531.16 C4.1@347.23,523.21 ; C3.1@292.29,518.02 C4.1@344.72,532.56 ; C3.1@292.33,518.03 C4.1@343.16,532.56 ; C3.1@292.98,508 C4.1@347.23,523.21 ; C3.1@293.3,518.32 C4.1@341.63,540.56 ; C3.1@293.75,540.94 C4.1@347.23,523.21 ; C3.1@295.86,508.63 C4.1@344.72,532.56 ; C3.1@296,508.67 C4.1@343.16,532.56 ; C3.1@298.35,509.63 C4.1@341.63,540.56 ; C4.1@352.75,521.89 C3.1@308.27,532.56 ; C4.1@352.75,543.23 C3.1@308.27,532.56 ; C4.1@354.02,532.56 C3.1@308.27,532.56 ; C3.1@290.91,524.53 C4.1@343.16,532.56 ; C3.1@290.91,524.53 C4.1@347.23,523.21 ; C3.1@290.91,524.53 C4.1@344.72,532.56 ; C3.1@290.91,524.53 C4.1@341.63,540.56 ; C4.1@343.16,532.56 291,541.18 C4.1@344.72,532.56
AVDD: C15.1 J1.1 R6.2 R13.2 TP15.1 U1.7 | length 1701.3
  Top Layer w10: J1.1@1380,205 1380,137.44 R13.2@1480,37.44 ; R6.2@1490,1312.56 1485.12,1312.56 C15.1@1430,1257.44 TP15.1@1507.44,1180 1507.44,1160.71 1518.94,1149.21 U1.7@1555.2,1149.21
  Bottom Layer w10: J1.1@1380,205 1315,270 1315,985 1475,1145 v1(1475,1212.44) 1475,1169.94 ; v1@1467.53,1211.78 1475,1169.94 ; v1@1482.47,1211.78 1475,1169.94
DM: H9.2 U2.16 | length 559.3
  Top Layer w10: H9.2@180,670.59 225.59,670.59 ; H9.2@198.7,670.59 225.59,670.59 ; v1@233.81,689.24 225.59,670.59 ; v1@235.19,620.75 270,645 ; v1(240,615) 270,645 ; v1@244.24,678.81 225.59,670.59 ; v1@245.75,610.19 270,645 ; 367.83,645 U2.16@406.69,645.75 ; U2.16@439.17,645 270,645 ; 225.59,670.59 v1(240,685) 225.59,670.59
  Bottom Layer w10: v1(240,615) v1(240,685)
DP: H9.3 U2.15 | length 345.2
  Top Layer w10: H9.3@180,645 235,645 ; H9.3@198.7,645 235,645 ; 367.83,671.34 U2.15@406.69,671.34 ; U2.15@439.17,671.34 261.34,671.34 235,645
DVDD: C16.2 TP16.1 U1.8 | length 238.2
  Top Layer w10: C16.2@1370,1257.44 1497.91,1129.53 U1.8@1555.2,1129.53
EN/IN2: H12.7 R22.1 U1.14 | length 687.3
  Top Layer w10: R22.1@967.56,950 H12.7@1250,950 1565,950 1600.47,985.47 U1.14@1600.47,1025.2
EN/IN2_MCU: R22.2 U3.9 | length 692.8
  Top Layer w10: U3.9@322.8,890.43 464.57,890.43 514.76,840.24 802.68,840.24 R22.2@912.44,950 ; U3.9@349.37,890.43 386.26,890.43
GH1: R2.1 U1.17 | length 1039.6
  Top Layer w10: U1.17@1659.53,1025.2 1659.53,850.47 2040,470 2232.44,470 R2.1@2327.44,375
GH2: R1.2 U1.24 | length 1079.7
  Top Layer w10: U1.24@1704.8,1149.21 1739.21,1149.21 1755,1165 1755,1225 1875,1345 1875,1560 2045,1730 v1(2232.44,1730) ; v1(2280,1805) 2300,1825 R1.2@2327.44,1825
  Bottom Layer w10: v1(2232.44,1730) 2280,1777.56 v1(2280,1805)
GL1: R4.1 U1.19 | length 714.1
  Top Layer w10: U1.19@1704.8,1050.79 1839.21,1050.79 2060,830 R4.1@2327.44,830
GL2: R3.2 U1.22 | length 921.7
  Top Layer w10: U1.22@1704.8,1110 1770,1110 1815,1155 1815,1205 2010,1400 2250,1400 2280,1370 R3.2@2327.44,1370 2281.69,1370 ; R3.2@2326.18,1359.33 2281.69,1370 ; R3.2@2326.18,1380.67 2281.69,1370
GND: C1.2 C2.2 C3.2 C4.2 C5.2 C6.2 C10.2 C11.2 C15.2 C16.1 C18.2 C19.2 C20.2 C21.2 C22.2 H9.5 H9.6 H9.7 H9.8 H9.9 H9.10 H9.11 H10.2 H12.9 H12.10 J1.11 J3.1 NT4.2 R8.1 R9.1 R19.3 R23.1 R26.1 R27.1 R28.1 R31.2 S1.3 S1.4 TP4.1 TP14.1 TP14.2 TP19.1 U1.5 U1.16 U1.25 U2.7 U2.18 U2.21 U2.25 U2.26 U3.20 | length 6338.5
  Top Layer w10: H9.5@180,593.82 221.18,593.82 ; v1@194.85,406.8 213.92,415.43 ; v1@197.99,393.21 245.27,389.84 ; H9.5@198.7,593.82 221.18,593.82 ; v1@201.4,407.78 245.27,389.84 ; v1@205.29,396.36 213.92,415.43 ; C3.2@275.08,449.31 244.53,465.47 ; C3.2@275.08,481.64 244.53,465.47 ; C3.2@278.45,458.85 244.53,465.47 ; C3.2@278.45,472.1 244.53,465.47 ; C3.2@279.09,465.47 244.53,465.47 ; C3.2@287.24,481.72 C4.2@342.4,485.63 ; C3.2@288.86,471.8 C4.2@342.4,485.63 ; C3.2@289.85,472.04 C4.2@344.16,477.44 ; C3.2@289.89,472.05 C4.2@346.64,477.44 ; C3.2@291.04,472.12 C4.2@349.32,467.59 ; C3.2@291.52,458.85 C4.2@349.32,467.59 ; C3.2@292.68,459.06 C4.2@346.64,477.44 ; C3.2@292.68,482.03 C4.2@349.32,467.59 ; C3.2@292.76,459.08 C4.2@344.16,477.44 ; C3.2@293.7,459.43 C4.2@342.4,485.63 ; C3.2@293.87,449.09 C4.2@349.32,467.59 ; C3.2@296.74,449.88 C4.2@346.64,477.44 ; C3.2@296.99,449.97 C4.2@344.16,477.44 ; C3.2@299.24,451.06 C4.2@342.4,485.63 ; C4.2@352.75,466.77 C3.2@308.27,477.44 ; C4.2@352.75,488.11 C3.2@308.27,477.44 ; C4.2@354.02,477.44 C3.2@308.27,477.44 ; 367.83,389.84 U2.26@406.69,389.84 ; 367.83,415.43 U2.25@406.69,415.43 ; U2.26@439.17,389.84 209.91,389.84 v1(199.12,400.63) ; U2.25@439.17,415.43 213.92,415.43 ; U2.21@439.17,517.8 395.35,517.8 ; U2.18@439.17,594.57 499.57,594.57 ; U2.18@471.65,594.57 499.57,594.57 ; C18.2@521.89,762.75 532.56,718.27 ; C18.2@521.97,762.19 535,718.13 ; C18.2@532.56,765 532.56,627.56 ; C18.2@535,765 535,630 532.56,627.56 ; C18.2@543.23,762.75 532.56,718.27 ; C18.2@543.29,763.33 535,718.13 ; 639.49,492.2 U2.7@678.35,492.2 ; U2.7@743.31,492.2 782.17,492.2 ; v1@797.21,507.88 752.39,492.2 ; v1@799.86,493.17 752.39,492.2 ; v1(1285,1090) 1305,1070 1305,1030 1332.56,1002.44 R31.2@1360,1002.44 ; C16.1@1370,1312.56 C15.2@1430,1312.56 1462.44,1345 ; C16.1@1370.35,1301.83 C15.2@1416.96,1304.48 ; C16.1@1370.35,1323.29 C15.2@1416.96,1320.64 ; C16.1@1374.05,1302.26 C15.2@1416.96,1320.64 ; C16.1@1374.05,1322.86 C15.2@1416.96,1304.48 ; C15.2@1424.21,1320.91 1462.44,1345 ; C15.2@1427.75,1301.89 C16.1@1383.27,1312.56 ; C15.2@1427.75,1323.23 C16.1@1383.27,1312.56 ; C15.2@1429.02,1312.56 C16.1@1383.27,1312.56 ; C15.2@1430.98,1312.56 1462.44,1345 ; C15.2@1439.54,1306.05 1462.44,1345 ; R8.1@1540.46,1306.05 1517.56,1345 ; R8.1@1544.33,1304.12 1578.73,1283.83 ; R8.1@1549.02,1312.56 1517.56,1345 ; R8.1@1550.98,1312.56 1578.73,1283.83 ; R8.1@1555.79,1320.91 1517.56,1345 ; R8.1@1559.65,1318.92 1578.73,1283.83 ; v1(1599.12,900.63) 1599.12,919.12 1639.84,959.84 U1.16@1639.84,1025.2 ; U1.16@1639.84,1021.26 1639.84,1090.16 v2(1630,1100) 1600.47,1129.53 1600.47,1234.53 1578.73,1256.27 1578.73,1283.83 ; R9.1@2113.76,1153.85 2165.66,1150.74 ; R9.1@2114.92,1100 2195,1180.08 2195,1325 2180,1340 NT4.2@2155,1340 ; R9.1@2114.92,1139.37 2165.66,1150.74 ; R9.1@2115.35,1163.89 2165.66,1150.74 ; R9.1@2120.05,1125.78 2165.66,1150.74 ; R9.1@2125.78,1117.38 2165.66,1150.74 ; v1(199.12,400.63) 213.92,415.43 ; v1(199.12,400.63) 245.27,389.84 ; 221.18,593.82 230,585 230,480 244.53,465.47 ; 244.53,465.47 C3.2@285,465.47 296.97,477.44 C4.2@355,477.44 395.35,517.8 ; C3.2@290.91,465.47 C4.2@344.16,477.44 ; C3.2@290.91,465.47 C4.2@342.4,485.63 ; C3.2@290.91,465.47 C4.2@346.64,477.44 ; C3.2@290.91,465.47 C4.2@349.32,467.59 ; C4.2@344.16,477.44 289.78,482.09 C4.2@346.64,477.44 ; 395.35,517.8 406.69,517.8 395.35,517.8 ; 499.57,594.57 532.56,627.56 ; 532.56,627.56 532.56,597.44 637.8,492.2 U2.7@710.83,492.2 790.69,492.2 v1(799.12,500.63) 752.39,492.2 ; 532.56,718.27 532.56,764.02 535,718.13 ; C16.1@1370.98,1312.56 C15.2@1416.73,1312.56 ; C16.1@1370.98,1312.56 C15.2@1416.96,1304.48 ; C16.1@1370.98,1312.56 C15.2@1416.96,1320.64 ; C16.1@1370.98,1312.56 C15.2@1416.73,1312.56 ; C15.2@1416.73,1312.56 1372.25,1323.23 C15.2@1416.73,1312.56 ; C15.2@1416.73,1312.56 1372.25,1301.89 C15.2@1416.73,1312.56 ; 1462.44,1345 1517.56,1345 ; 1517.56,1345 R8.1@1550,1312.56 1578.73,1283.83
  other v1: 399.12,100.63 499.12,100.63 899.12,100.63 999.12,100.63 1099.12,100.63 1299.12,100.63 399.12,200.63 499.12,200.63 599.12,200.63 799.12,200.63 899.12,200.63 999.12,200.63 1099.12,200.63 1299.12,200.63 1999.12,200.63 2299.12,200.63 2399.12,200.63 2599.12,200.63 2699.12,200.63 2799.12,200.63 2999.12,200.63 3099.12,200.63 799.12,300.63 899.12,300.63 999.12,300.63 1099.12,300.63 1999.12,300.63 2099.12,300.63 2199.12,300.63 2299.12,300.63 2599.12,300.63 2699.12,300.63 2799.12,300.63 2899.12,300.63 2999.12,300.63 3099.12,300.63 799.12,400.63 899.12,400.63 999.12,400.63 1099.12,400.63 1999.12,400.63 2099.12,400.63 2199.12,400.63 2899.12,400.63 2999.12,400.63 3099.12,400.63 3199.12,400.63 3299.12,400.63 2429.12,410.63 2529.12,410.63 2429.12,470.63 3400,500 899.12,500.63 999.12,500.63 1099.12,500.63 3099.12,500.63 3199.12,500.63 3299.12,500.63 2100,550 2049.12,550.63 2149.12,550.63 3400,600 799.12,600.63 899.12,600.63 999.12,600.63 1099.12,600.63 1999.12,600.63 2049.12,600.63 2149.12,600.63 3199.12,600.63 3299.12,600.63 1999.12,650.63 2049.12,650.63 2099.12,650.63 2149.12,650.63 799.12,700.63 899.12,700.63 999.12,700.63 1099.12,700.63 1399.12,700.63 1499.12,700.63 1599.12,700.63 1699.12,700.63 1999.12,700.63 2049.12,700.63 2099.12,700.63 2149.12,700.63 3299.12,700.63 3399.12,700.63 899.12,800.63 999.12,800.63 1099.12,800.63 1399.12,800.63 1499.12,800.63 1599.12,800.63 1799.12,800.63 1899.12,800.63 1999.12,800.63 2099.12,800.63 2199.12,800.63 3399.12,800.63 1285,900 99.12,900.63 199.12,900.63 1099.12,900.63 1499.12,900.63 1799.12,900.63 1899.12,900.63 1999.12,950.63 2049.12,950.63 2099.12,950.63 2149.12,950.63 1099.12,1000.63 1799.12,1000.63 2049.12,1000.63 2099.12,1000.63 2149.12,1000.63 1524.12,1005.63 670,1020 2049.12,1050.63 1099.12,1100.63 2049.12,1100.63 2049.12,1150.63 1950,1200 2000,1200 2050,1200 2100,1200 2150,1200 199.12,1200.63 399.12,1200.63 699.12,1200.63 1099.12,1200.63 1719.12,1200.63 2000,1250 2050,1250 2100,1250 2150,1250 99.12,1300.63 199.12,1300.63 299.12,1300.63 399.12,1300.63 599.12,1300.63 1099.12,1300.63 1819.12,1330.63 1314.12,1350.63 1779.12,1370.63 599.12,1400.63 699.12,1400.63 1099.12,1400.63 3399.12,1400.63 1779.12,1405.63 1779.12,1440.63 1839.12,1480.63 3400,1500 599.12,1500.63 699.12,1500.63 799.12,1500.63 1099.12,1500.63 1499.12,1500.63 1599.12,1500.63 1949.12,1500.63 1999.12,1500.63 2049.12,1500.63 2099.12,1500.63 2149.12,1500.63 3299.12,1500.63 1839.12,1520.63 2000,1550 1949.12,1550.63 2049.12,1550.63 2099.12,1550.63 2149.12,1550.63 3400,1600 599.12,1600.63 699.12,1600.63 799.12,1600.63 999.12,1600.63 1099.12,1600.63 1999.12,1600.63 2049.12,1600.63 2149.12,1600.63 3199.12,1600.63 3299.12,1600.63 2049.12,1650.63 2099.12,1650.63 2149.12,1650.63 599.12,1700.63 699.12,1700.63 799.12,1700.63 899.12,1700.63 999.12,1700.63 1099.12,1700.63 1299.12,1700.63 1499.12,1700.63 1599.12,1700.63 1699.12,1700.63 1799.12,1700.63 3099.12,1700.63 3199.12,1700.63 3299.12,1700.63 3399.12,1700.63 2520,1775 2575,1795 1500,1800 599.12,1800.63 699.12,1800.63 799.12,1800.63 899.12,1800.63 999.12,1800.63 1099.12,1800.63 1599.12,1800.63 1699.12,1800.63 1799.12,1800.63 1899.12,1800.63 1999.12,1800.63 2099.12,1800.63 2199.12,1800.63 899.12,1900.63 999.12,1900.63 1099.12,1900.63 1599.12,1900.63 1099.12,2000.63 2099.12,2000.63 2199.12,2000.63 2299.12,2000.63 2399.12,2000.63 799.12,2100.63 899.12,2100.63 999.12,2100.63 1099.12,2100.63 1599.12,2100.63 1699.12,2100.63 1799.12,2100.63 1899.12,2100.63 1999.12,2100.63 2199.12,2100.63 2399.12,2100.63
  other v2: 1630,1054.72 1584.72,1100 1675.28,1100 1630,1145.28
IDRIVE: J1.2 J1.4 J1.6 J1.8 J1.10 J1.12 U1.12 | length 1383.4
  Top Layer w10: J1.2@1380,305 J1.4@1480,305 J1.6@1580,305 J1.8@1680,305 J1.10@1780,305 J1.12@1880,305 ; v1(1475,1000) 1475,1025 1500.79,1050.79 U1.12@1555.2,1050.79
  Bottom Layer w10: J1.2@1380,305 1340,345 1340,865 v1(1475,1000)
NetC12_1: C12.1 U1.3 | length 180.2
  Top Layer w10: C12.1@1610,1342.56 1640,1312.56 U1.3@1640,1174.8
NetC12_2: C12.2 U1.4 | length 116.8
  Top Layer w10: C12.2@1610,1287.44 1610,1260 1620.16,1249.84 U1.4@1620.16,1174.8